# Altium PCB PCB1.PcbDoc
Units mm, origin at the board's own origin, x right, y up, seen from the top; angles counter-clockwise.
Board outline 100 x 100 mm, 4 copper layers (Top Layer, Internal Plane 1, Internal Plane 2, Bottom Layer); 98 components, 102 nets, 442 pads, 83 vias.
Unrouted connection lines stored in the file: 110.
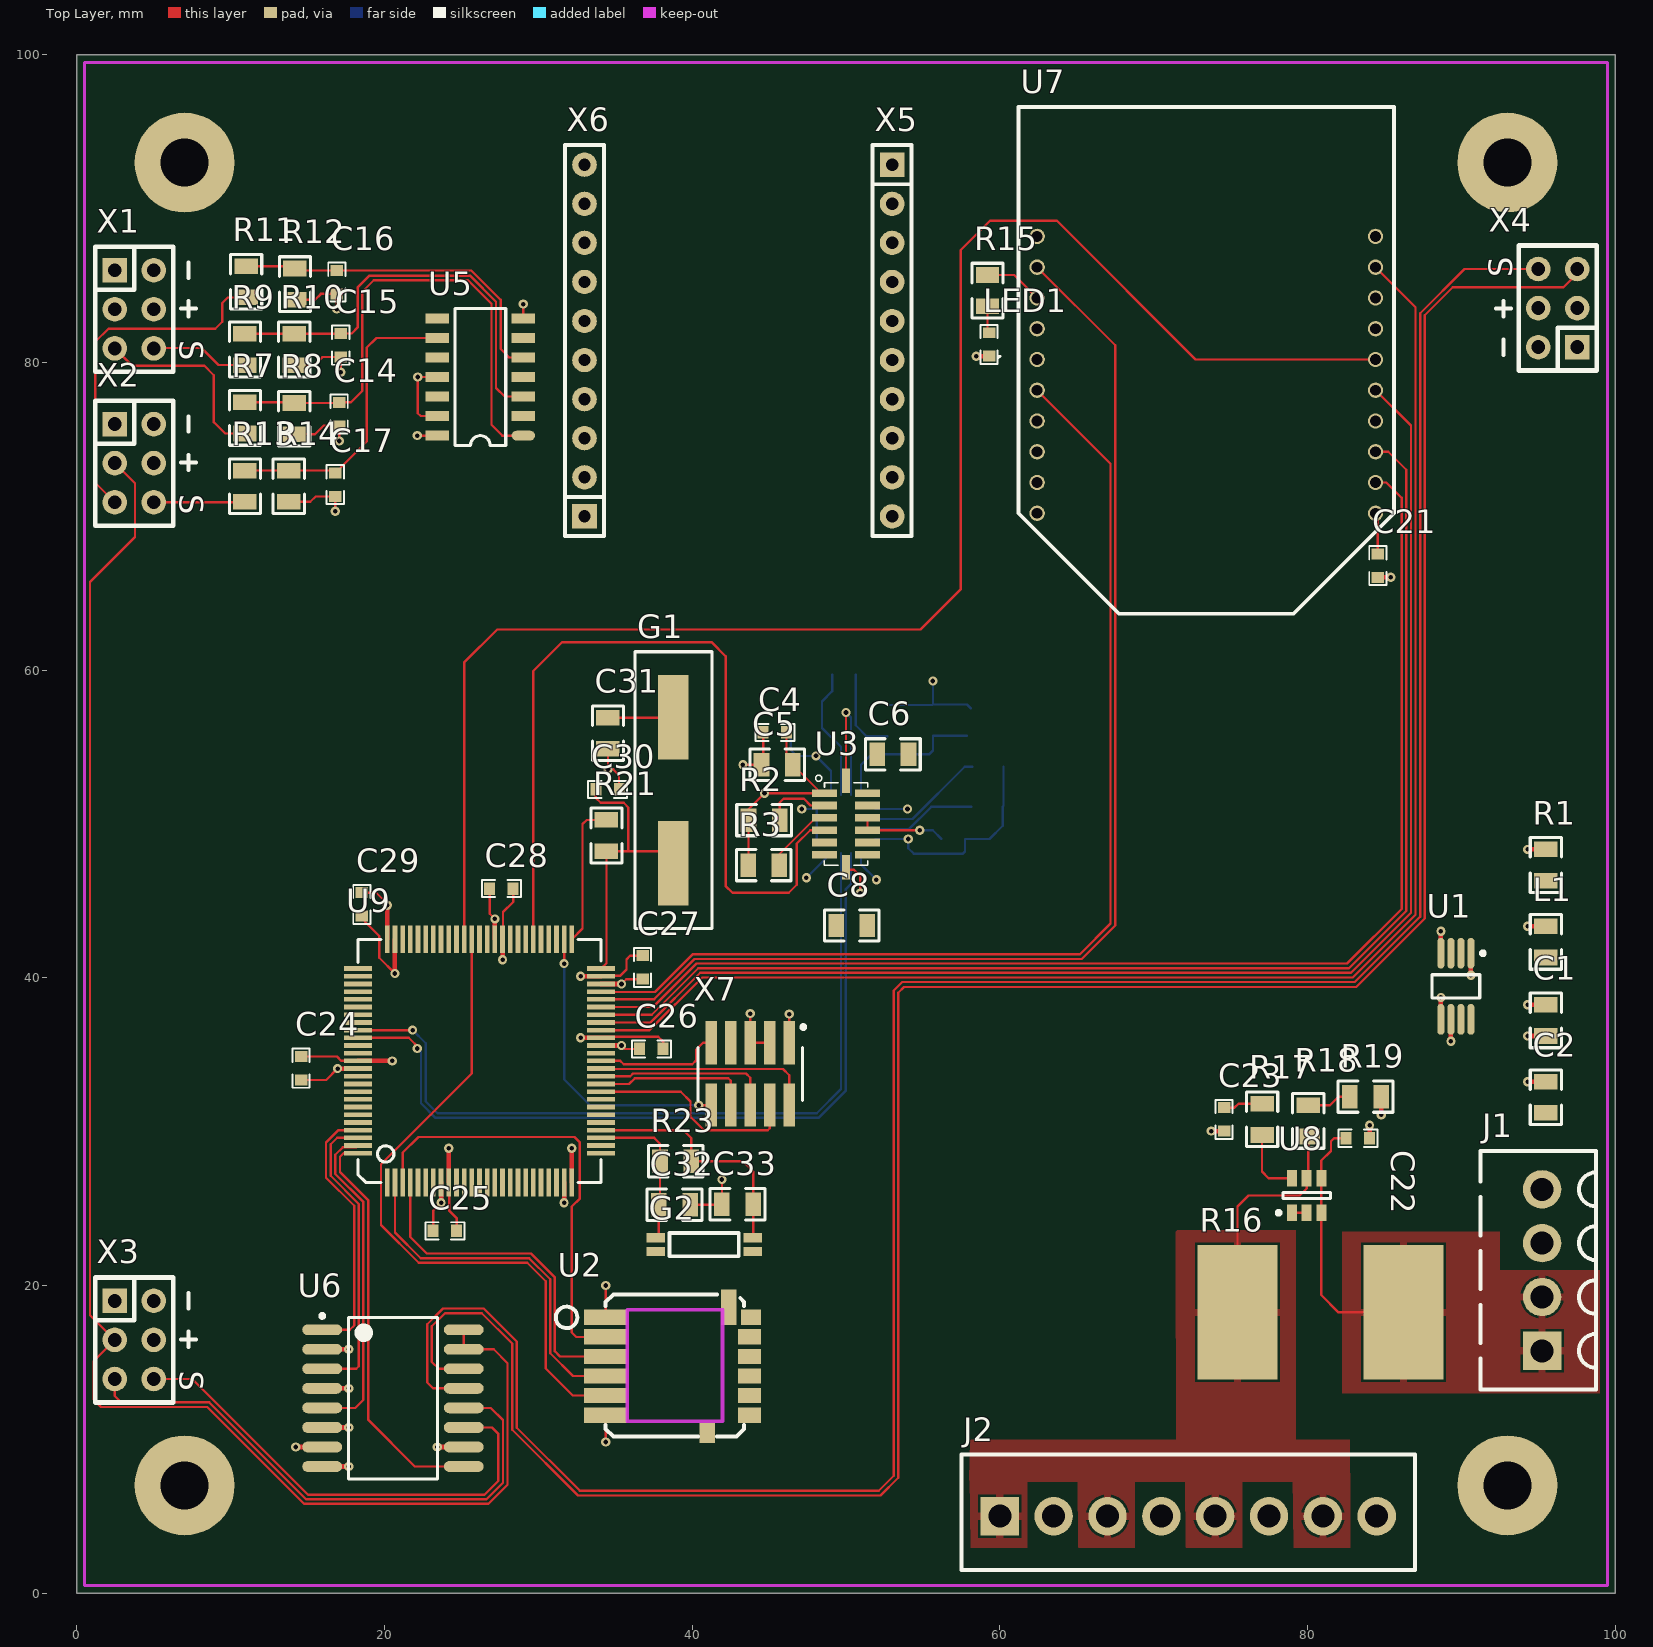
[diagram p0: Top Layer view]
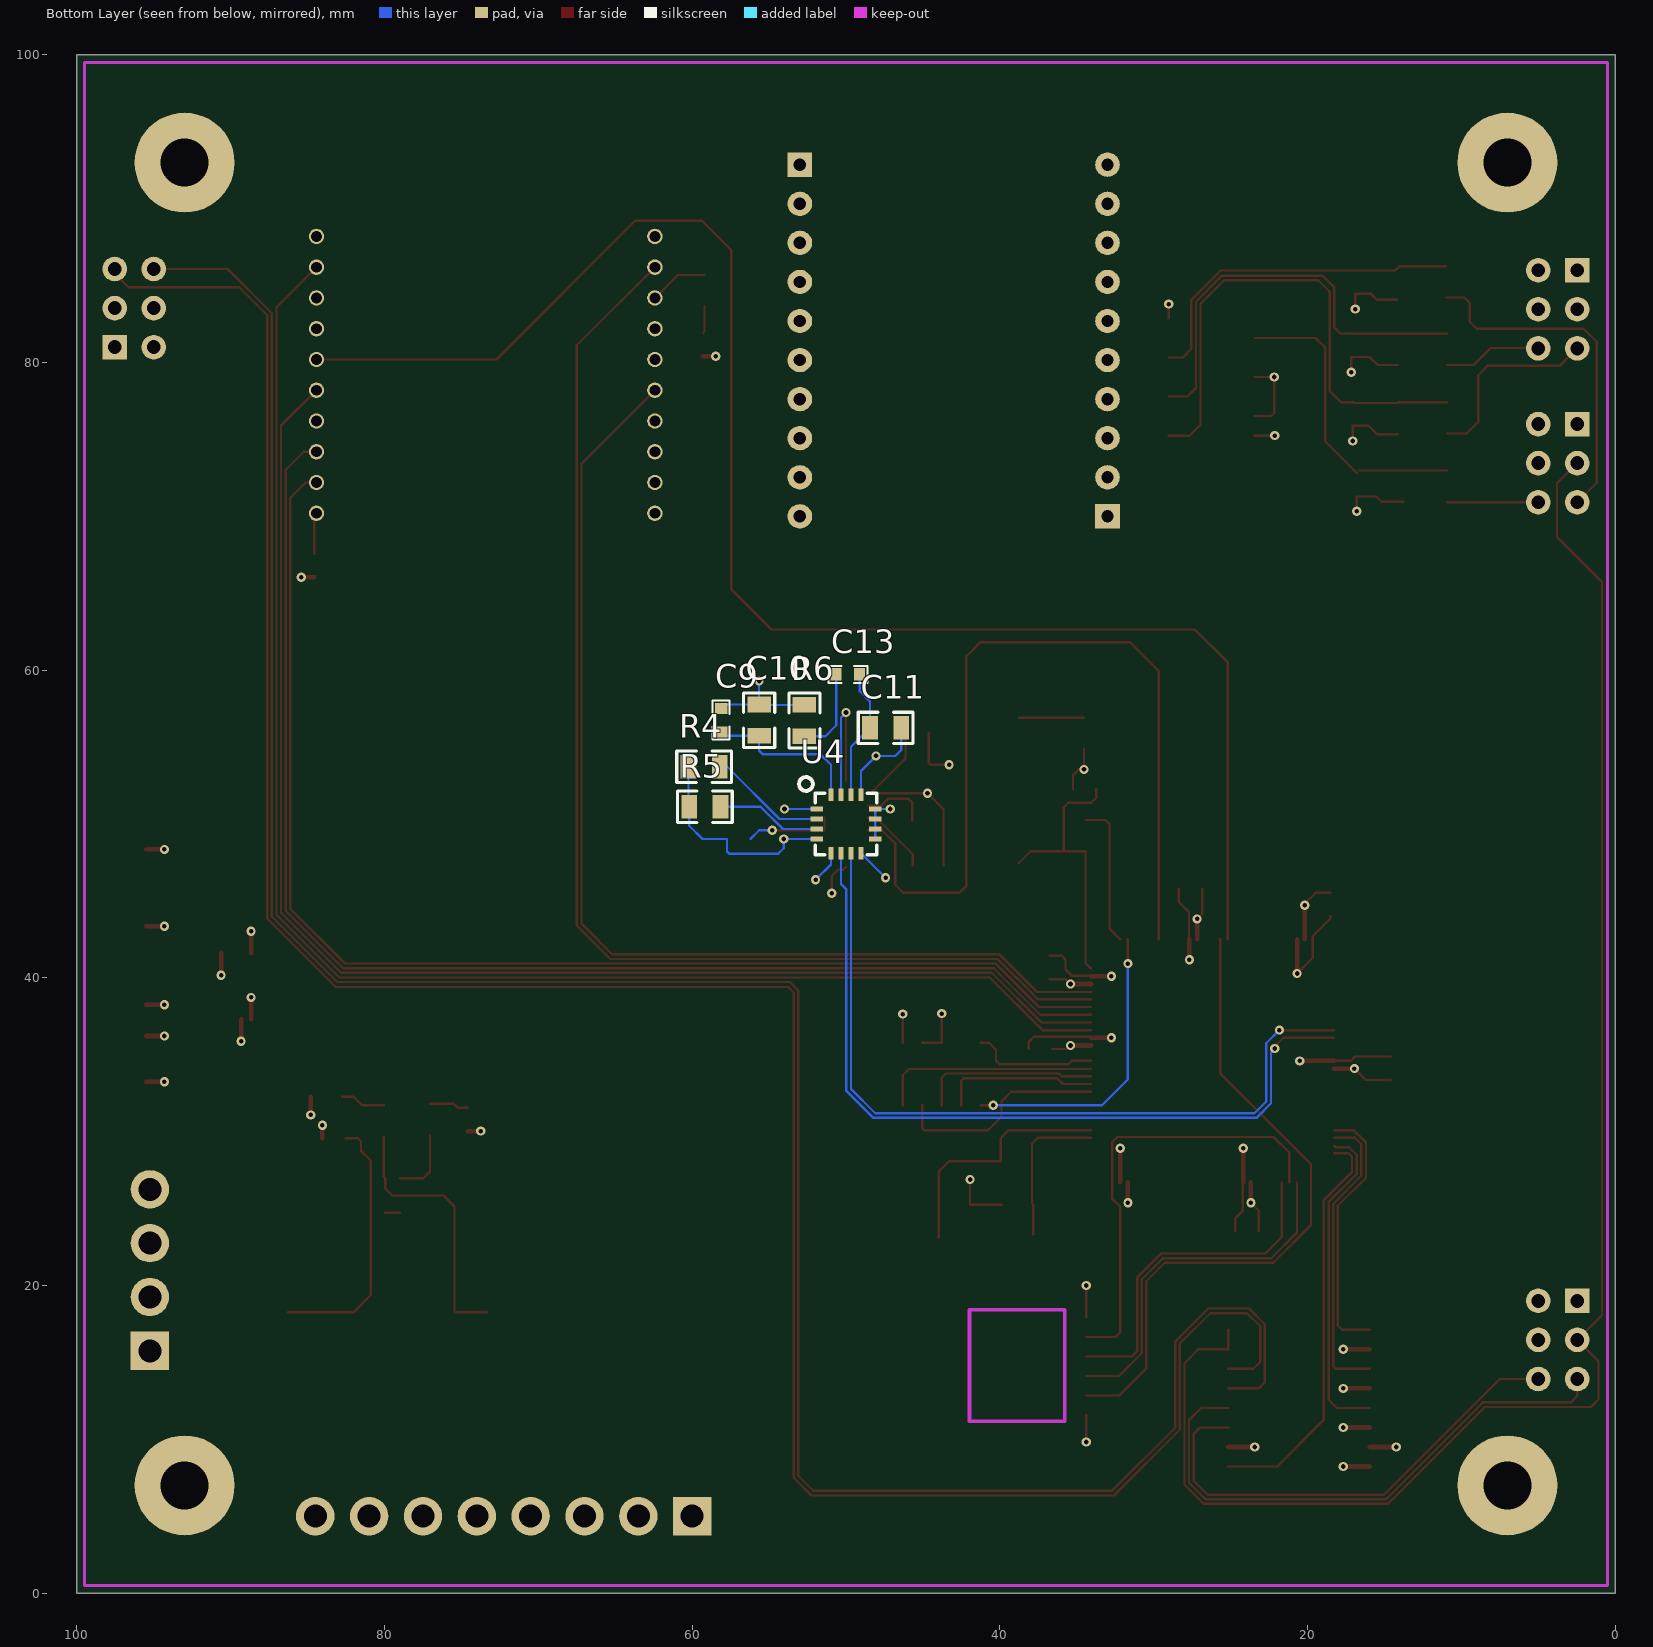
[diagram p1: Bottom Layer view, seen from below]
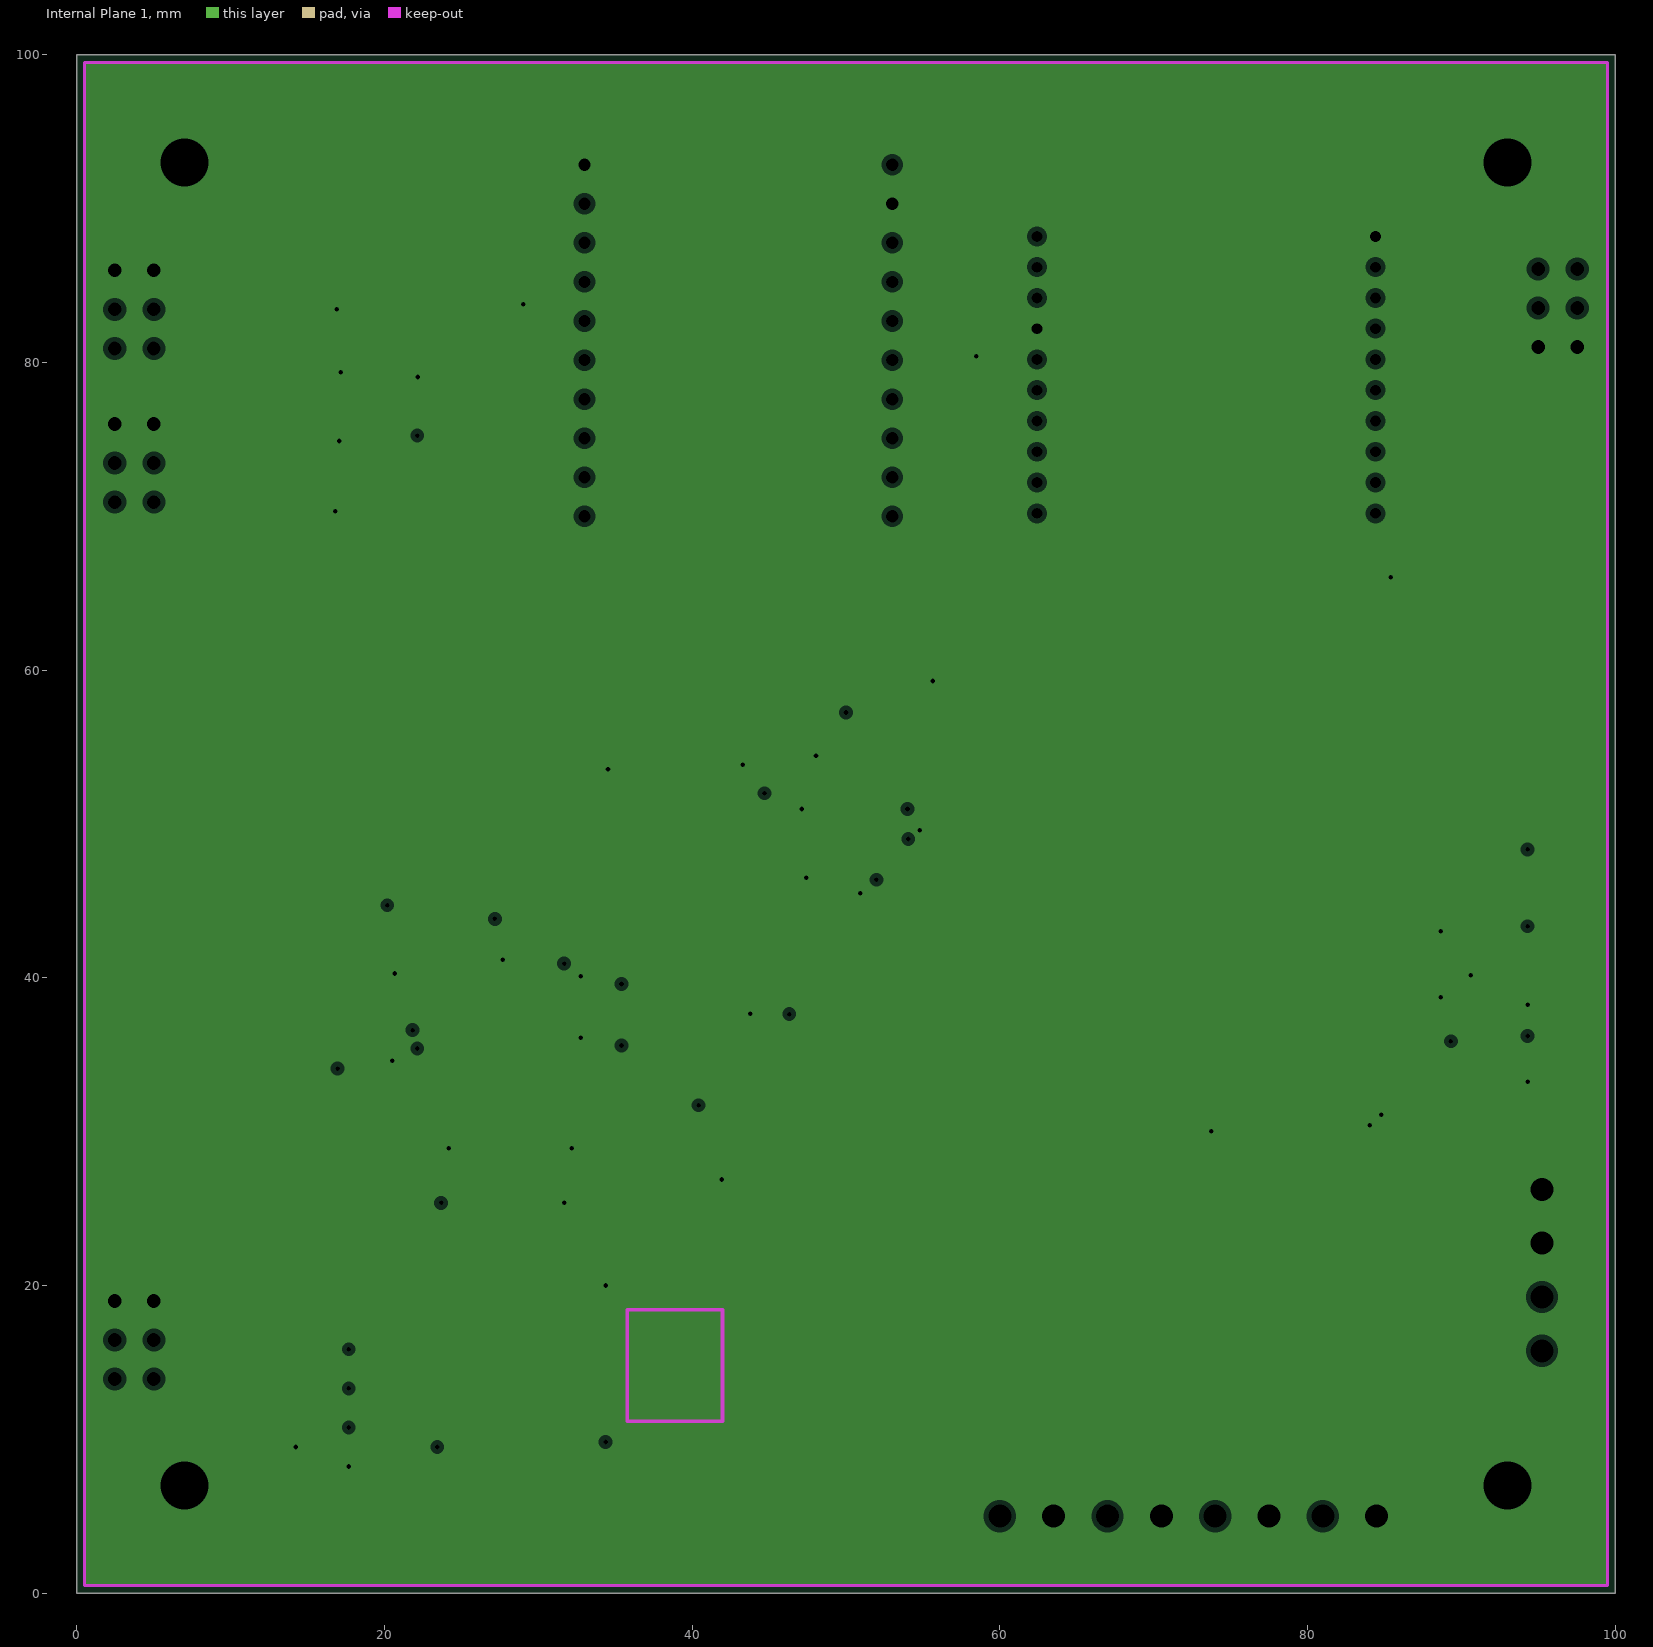
[diagram p2: Internal Plane 1, clearances drawn from the general rule]
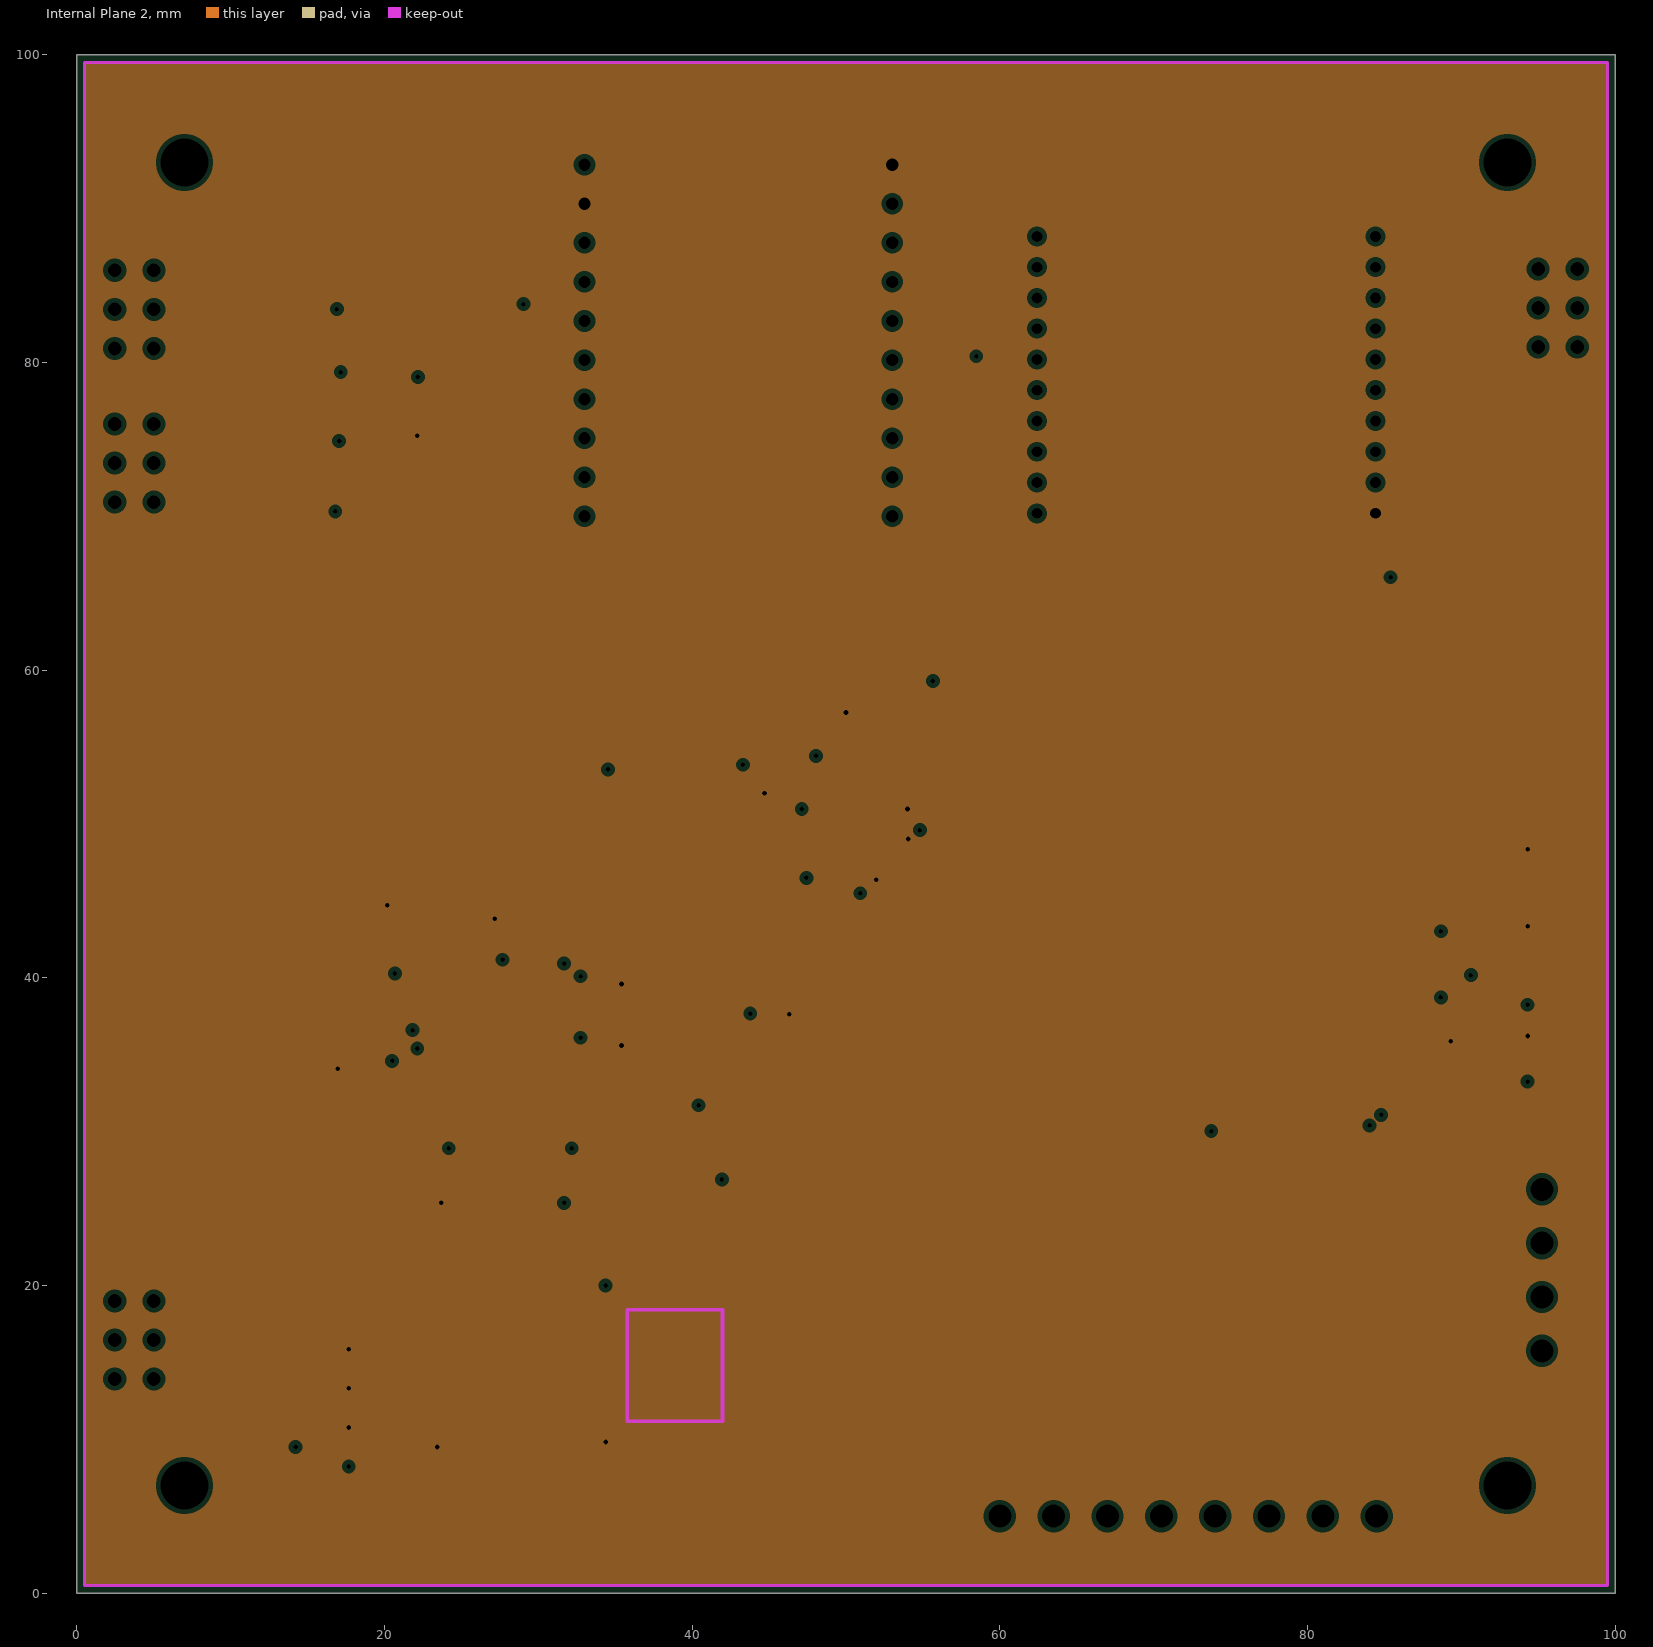
[diagram p3: Internal Plane 2, clearances drawn from the general rule]

## Layer stack, top to bottom
Top Layer: signal copper 0.0356
Dielectric: core 0.32, FR-4, Dk 4.8
Internal Plane 1: plane copper 0.0356, net GND
Dielectric: prepreg 0.32, FR-4, Dk 4.8
Internal Plane 2: plane copper 0.0356, net 3.3V
Dielectric: core 0.32, FR-4, Dk 4.8
Bottom Layer: signal copper 0.0356

## Board outline
0,0 100,0 100,100 0,100

## Design rules (kind name [scope] priority, off if disabled: settings)
Clearance [All] p1: gap=0.15
HoleSize [All] p1: absolutevalues=TRUE maxlimit=5 minlimit=0.3 maxpercent=80.000 minpercent=20.000
PlaneClearance [All] p1: clearance=0.3
PlaneConnect [All] p1: planeconnectstyle=Relief reliefexpansion=0.3 reliefentries=4 reliefconductorwidth=0.254 reliefairgap=0.2
PolygonConnect [All] p1: connectstyle=Relief reliefconductorwidth=0.5 reliefentries=4 polygonreliefangle="90 Angle"
RoutingVias [All] p1: holewidth=0.3 width=0.6 viastyle="Through Hole" minholewidth=0.3 minwidth=0.6 maxholewidth=0.3 maxwidth=0.6
SilkscreenOverComponentPads [All] p1: minsilkscreentomaskgap=0.254
SolderMaskExpansion [All] p1: expansion=0.102
Width [All] p1: maxlimit=5 minlimit=0.15 preferedwidth=0.3
24 further rules are at their usual default settings.

## Classes and differential pairs
component class Alimentation: C1 C2 L1 R1 U1
component class Capteurs: C3 C4 C5 C6 C8 C9 C10 C11 C13 R2 R3 R4 R5 R6 U2 U3 U4
component class ControlCommande&Motors: C14 C15 C16 C17 C18 C19 C20 R7 R8 R9 R10 R11 R12 R13 R14 U5 U6 X1 X2 X3 X4
component class InterfaceDataTelemetrie: C21 LED1 R15 U7
component class InterfaceExtension: X5 X6
component class MesureAlimentation: C22 C23 J1 J2 R16 R17 R18 R19 U8
component class Microcontroleur: BT1 C24 C25 C26 C27 C28 C29 C30 C31 C32 C33 C34 C35 C36 C37 D1 G1 G2 L2 L3 LED2 LED3 LED4 LED5 LED6 LED7 LED8 R20 R21 R22 R23 R24 R25 R26 R27 R28 R29 R30 U9 X7

## Components (designator, comment, footprint, x,y, rotation, side; value= is the part's Value field where it differs from the comment)
BT1 "3000TR" 3000TR -167.375,40.25 r90 top
C1 "C2012X5R1A226M/1.25" 080501 95.5,37.234 r90 top
C2 "GRM21BR61E106KA73L" 080501 95.5,32.234 r90 top
C3 "GRM188R71E104KA01D" 060301 196.784,18.1 r0 top
C4 "GRM188R71E104KA01D" 060301 45.375,55.95 r270 top
C5 "08056D106KAT2A" 080501 45.525,53.85 r0 top
C6 "UMK212F224ZD-T" 080501 53.05,54.525 r180 top
C8 "C0805C475K4PACTU" 080501 50.375,43.4 r0 top
C9 "GRM188R71E104KA01D" 060301 58.125,56.75 r0 bottom
C10 "08056D106KAT2A" 080501 55.65,56.75 r270 bottom
C11 "C0805C103K4RACTU" 080501 47.425,56.25 r0 bottom
C13 "C2012Y5V1H474Z/0.85" 060301 49.875,59.725 r270 bottom
C14 "GRM188R71E104KA01D" 060301 17.05,76.65 r180 top
C15 "GRM188R71E104KA01D" 060301 17.15,81.125 r180 top
C16 "GRM188R71E104KA01D" 060301 16.9,85.225 r180 top
C17 "GRM188R71E104KA01D" 060301 16.8,72.059 r180 top
C18 "GRM188R71E104KA01D" 060301 -125.575,23.8 r0 top
C19 "GRM188R71E104KA01D" 060301 135.499,36.099 r0 top
C20 "GRM188R71E104KA01D" 060301 141.099,36.099 r0 top
C21 "GRM188R71E104KA01D" 060301 84.575,66.8 r180 top
C22 "GRM188R71E104KA01D" 060301 83.275,29.575 r270 top
C23 "GRM188R71E104KA01D" 060301 74.575,30.8 r180 top
C24 "GRM188R71E104KA01D" 060301 14.575,34.125 r0 top
C25 "GRM188R71E104KA01D" 060301 23.925,23.55 r270 top
C26 "GRM188R71E104KA01D" 060301 37.35,35.375 r270 top
C27 "GRM188R71E104KA01D" 060301 36.775,40.675 r0 top
C28 "GRM188R71E104KA01D" 060301 27.6,45.8 r270 top
C29 "GRM188R71E104KA01D" 060301 18.525,44.775 r180 top
C30 "GQM2195C1H200JB01D" 060301 34.5,52.25 r270 top
C31 "GQM2195C1H200JB01D" 080501 34.525,55.9 r270 top
C32 "GRM21A5C2E120JW01D" 080501 38.85,25.25 r0 top
C33 "GRM21A5C2E120JW01D" 080501 42.95,25.275 r180 top
C34 "GRM188R71E104KA01D" 060301 -134.8,52.25 r0 top
C35 "GRM188R71E104KA01D" 060301 -142.775,52.825 r0 top
C36 "GRM188R71E104KA01D" 060301 -152.75,52.475 r0 top
C37 "GRM188R71E104KA01D" 060301 -162.725,52.4 r0 top
D1 "BAT54C" SOT2301 -155.975,55.225 r0 top
G1 "ECS-40-20-5PX-TR" Crystal 38.775,52.2 r90 top
G2 "ECS-.327-12.5-38" Crystal2 40.775,22.65 r180 top
J1 "CON4" SL354D 95.25,15.75 r90 top
J2 "CON8" SL358D 60,5 r0 top
L1 "VLF3012ST-2R2M1R4" 080503 95.5,42.334 r90 top
L2 "BLM21AG601SN1D" 080501 -130.575,56.375 r0 top
L3 "BLM21AG601SN1D" 080501 -146.775,55.775 r0 top
LED1 "LG L29K-G2J1-24-Z" 060301_led 59.3,81.175 r180 top
LED2 "LG L29K-G2J1-24-Z" 060301_led -34.45,50.425 r90 top
LED3 "LG L29K-G2J1-24-Z" 060301_led -53.675,57.6 r90 top
LED4 "LG L29K-G2J1-24-Z" 060301_led -66.375,57.925 r90 top
LED5 "LG L29K-G2J1-24-Z" 060301_led -80.2,56.675 r90 top
LED6 "LG L29K-G2J1-24-Z" 060301_led -93.8,56.875 r90 top
LED7 "LG L29K-G2J1-24-Z" 060301_led -107.45,56.1 r90 top
LED8 "LG L29K-G2J1-24-Z" 060301_led -126.7,56.75 r90 top
R1 "ERJ-6GEYJ104V" 080501 95.5,47.334 r90 top
R2 "ERJ-6GEYJ103V" 080501 44.675,50.25 r180 top
R3 "ERJ-6GEYJ103V" 080501 44.65,47.325 r180 top
R4 "ERJ-6GEYJ103V" 080501 59.225,53.725 r0 bottom
R5 "ERJ-6GEYJ103V" 080501 59.175,51.125 r0 bottom
R6 "ERJ-6GEYJ103V" 080501 52.7,56.725 r90 bottom
R7 "RMCF0805JT820R" 080501 10.925,76.4 r90 top
R8 "ERJ-6GEYJ162V" 080501 14.125,76.35 r270 top
R9 "RMCF0805JT820R" 080501 10.925,80.85 r90 top
R10 "ERJ-6GEYJ162V" 080501 14.125,80.85 r270 top
R11 "RMCF0805JT820R" 080501 11,85.25 r90 top
R12 "ERJ-6GEYJ162V" 080501 14.175,85.1 r270 top
R13 "RMCF0805JT820R" 080501 10.925,71.959 r90 top
R14 "ERJ-6GEYJ162V" 080501 13.775,71.959 r270 top
R15 "RMCF0805JT820R" 080501 59.2,84.675 r270 top
R16 "WSLP59313L000FEB" 5.2x8.75 86.25,18.25 r0 top
R17 "ERJ-6GEYJ103V" 080501 77.05,30.8 r90 top
R18 "ERJ-6GEYJ822V" 080501 80.05,30.7 r90 top
R19 "ERJ-6GEYJ162V" 080501 83.775,32.275 r0 top
R20 "RC0603FR-071KL" 060301 -142.475,42.625 r0 top
R21 "RMCF0805JT820R" 080501 34.425,49.25 r270 top
R22 "RMCF0805JT820R" 080501 -17.675,52.987 r0 top
R23 "ERJ-6GEYJ103V" 080501 38.925,28.075 r180 top
R24 "RMCF0805JT820R" 080501 -41.075,52.987 r0 top
R25 "RMCF0805JT820R" 080501 -60.075,52.987 r0 top
R26 "RMCF0805JT820R" 080501 -73.275,52.987 r0 top
R27 "RMCF0805JT820R" 080501 -86.575,52.987 r0 top
R28 "RMCF0805JT820R" 080501 -99.775,52.987 r0 top
R29 "RMCF0805JT820R" 080501 -118.775,52.987 r0 top
R30 "RC0603FR-071KL" 060301 -110.65,52.75 r0 top
U1 "TPS62160DGK" TSOP65P490-8AM 89.65,39.45 r270 top
U2 "MS5534-CM" MS5534B 34.375,17.925 r180 top
U3 "LSM303DLHCTR" LGA-14L 50,50 r90 top
U4 "L3G4200DTR" LGA-16 50,50 r180 bottom
U5 "SN74AHC14D" SO1401 29.025,75.25 r180 top
U6 "MIC4468ZWM" SOIC127P1030-16M 20.55,12.675 r0 top
U7 "XBP24BZ7WIT-004J" XBee-Pro 73.425,88.2 r180 top
U8 "MAX4173TEUT+T" SOT26A-6AM 79.95,25.85 r90 top
U9 "MK10DN512ZVLL10" QFP100-1 20.175,26.7 r0 top
X1 "CON6/CP" J2X3_2.54 5,86 r270 top
X2 "CON6/CP" J2X3_2.54 5,76 r270 top
X3 "CON6/CP" J2X3_2.54 5,19 r270 top
X4 "CON6/CP" J2X3_2.54 95,81 r90 top
X5 "CON10" SIP10 53,92.86 r270 top
X6 "CON10" SIP10 33,70 r90 top
X7 "CON10" FTSH-105-XX-X-DV-K 43.775,33.75 r0 top

## Footprints (in the part's own frame and the unit in brackets; to place one, negate y for a bottom-side part, rotate by r counter-clockwise, add the part's x,y. Pads: shape width x height; smd on the part's side, far side on the other; paste and mask are expansions set on the pad)
5.2x8.75 [mm] "PowerResistorFootPrint"
  rect 5.2x8.75 smd: 1(0,0) 2(-10.8,0)
3000TR [mm] "HOLDER BATTERY COIN 12MM DIA SMD"
  rect 3.2x3.2 smd: 1(-7.85,0) 3(7.85,0)
  rect 5x5 smd: 2(0,0)
  silkscreen extent -6.6,-6.7 6.8,6.5
060301 [mil]
  rect 32.01x27.99 smd: 1(0,-30) 2(0,30)
  silkscreen extent -22,-50 22,50
060301_led [mil] "LED"
  rect 32.01x27.99 smd: 1(0,-30) 2(0,30)
  silkscreen extent -30,-50 22,50
080501 [mil]
  rect 40x60 smd: 1(-40,0) 2(40,0)
  silkscreen extent -70,-40 70,40
080503 [mil]
  rect 40x60 smd: 1(-40,0) 2(40,0)
  silkscreen extent -70,-40 70,40
Crystal [mm]
  rect 5.5x2 smd: 1(-4.75,0) 2(4.75,0)
  silkscreen extent -9,-2.5 9,2.5
Crystal2 [mm]
  rect 1.2x0.6 smd: 1(-3.15,-0.45) 2(3.15,-0.45) 3(3.15,0.45) 4(-3.15,0.45)
  silkscreen extent -2.25,-0.75 2.25,0.75
FTSH-105-XX-X-DV-K [mm] "1.27mm pitch, 10 pin, terminal strip; keyed"
  rect 0.75x2.8 smd mask+0: 1(2.54,2.03) 2(2.54,-2.03) 3(1.27,2.03) 4(1.27,-2.03) 5(0,2.03) 6(0,-2.03) 7(-1.27,2.03) 8(-1.27,-2.03) 9(-2.54,2.03) 10(-2.54,-2.03)
  silkscreen extent -3.39,-1.71 3.57,3.17
J2X3_2.54 [mm]
  rect 1.6x1.6 hole 0.9: 1(0,-2.54)
  round 1.6 hole 0.9: 2(0,0) 3(2.54,-2.54) 4(2.54,0) 5(5.08,-2.54) 6(5.08,0)
  silkscreen extent -1.52,-3.81 6.6,2.75
LGA-14L [mm]
  rect 0.5x1.6 smd: 1(2,1.4) 2(1.2,1.4) 3(0.4,1.4) 4(-0.4,1.4) 5(-1.2,1.4) 6(-2,1.4) 8(-2,-1.4) 9(-1.2,-1.4) 10(-0.4,-1.4) 11(0.4,-1.4) 12(1.2,-1.4) 13(2,-1.4)
  rect 1.6x0.5 smd: 7(-2.8,0) 14(2.8,0)
  silkscreen extent -2.67,-1.4 3.17,1.98
LGA-16 [mm]
  rect 0.8x0.3 smd: 1(-1.9,0.975) 2(-1.9,0.325) 3(-1.9,-0.325) 4(-1.9,-0.975) 9(1.9,-0.975) 10(1.9,-0.325) 11(1.9,0.325) 12(1.9,0.975)
  rect 0.3x0.8 smd: 5(-0.975,-1.9) 6(-0.325,-1.9) 7(0.325,-1.9) 8(0.975,-1.9) 13(0.975,1.9) 14(0.325,1.9) 15(-0.325,1.9) 16(-0.975,1.9)
  silkscreen extent -3.05,-2 2,3.05
MS5534B [mm] "Barometer Module"
  rect 2.8x1 smd: 1(0,0) 2(0,1.27) 3(0,2.54) 4(0,3.81) 5(0,5.08) 6(0,6.35)
  rect 1x1.3 smd: 7(-6.6,7.525)
  rect 1x2.3 smd: 8(-8,-0.65)
  rect 1.5x1 smd: 9(-9.35,6.35) 10(-9.35,5.08) 11(-9.35,3.81) 12(-9.35,2.54) 13(-9.35,1.27)
  rect 1.3x1 smd: 14(-9.45,0)
  Keep-Out Layer lines w0.25: -1.4,6.75 -7.6,6.75 -7.6,-0.5 -1.4,-0.5 -1.4,6.75
  silkscreen extent -9,-1.5 3.24,7.75
QFP100-1 [mil]
  rect 12.01x70.98 smd: 1(0,0) 2(19.69,0)
  rect 12x71 smd: 3(39.37,0) 4(59.06,0) 5(78.74,0) 6(98.43,0) 7(118.11,0) 8(137.8,0) 9(157.48,0) 10(177.17,0) 11(196.85,0) 12(216.54,0) 13(236.22,0) 14(255.91,0) 15(275.59,0) 16(295.28,0) 17(314.96,0) 18(334.65,0) 19(354.33,0) 20(374.02,0) 21(393.7,0) 22(413.39,0) 23(433.07,0) 24(452.76,0) 25(472.44,0) 51(472.44,622.05) 52(452.76,622.05) 53(433.07,622.05) 54(413.39,622.05) 55(393.7,622.05) 56(374.02,622.05) 57(354.33,622.05) 58(334.65,622.05) 59(314.96,622.05) 60(295.28,622.05) 61(275.59,622.05) 62(255.91,622.05) 63(236.22,622.05) 64(216.54,622.05) 65(196.85,622.05) 66(177.17,622.05) 67(157.48,622.05) 68(137.8,622.05) 69(118.11,622.05) 70(98.43,622.05) 71(78.74,622.05) 72(59.06,622.05) 73(39.37,622.05) 74(19.69,622.05) 75(0,622.05)
  rect 71x12 smd: 26(547.24,74.8) 27(547.24,94.49) 28(547.24,114.17) 29(547.24,133.86) 30(547.24,153.54) 31(547.24,173.23) 32(547.24,192.91) 33(547.24,212.6) 34(547.24,232.28) 35(547.24,251.97) 36(547.24,271.65) 37(547.24,291.34) 38(547.24,311.02) 39(547.24,330.71) 40(547.24,350.39) 41(547.24,370.08) 42(547.24,389.76) 43(547.24,409.45) 44(547.24,429.13) 45(547.24,448.82) 46(547.24,468.5) 47(547.24,488.19) 48(547.24,507.87) 49(547.24,527.56) 50(547.24,547.24) 77(-74.8,527.56) 78(-74.8,507.87) 79(-74.8,488.19) 80(-74.8,468.5) 81(-74.8,448.82) 82(-74.8,429.13) 83(-74.8,409.45) 84(-74.8,389.76) 85(-74.8,370.08) 86(-74.8,350.39) 87(-74.8,330.71) 88(-74.8,311.02) 89(-74.8,291.34) 90(-74.8,271.65) 91(-74.8,251.97) 92(-74.8,232.28) 93(-74.8,212.6) 94(-74.8,192.91) 95(-74.8,173.23) 96(-74.8,153.54) 97(-74.8,133.86) 98(-74.8,114.17) 99(-74.8,94.49) 100(-74.8,74.8)
  rect 70.98x12.01 smd: 76(-74.8,547.24)
  silkscreen extent -75,0 547,622
SIP10 [mil]
  rect 62x63 hole 31.5: 1(0,0)
  oval 62x63 hole 31.5: 2(100,0) 3(200,0) 4(300,0) 5(400,0) 6(500,0) 7(600,0) 8(700,0) 9(800,0) 10(900,0)
  silkscreen extent -50,-50 950,50
SL354D [mm]
  rect 2.5x2.5 hole 1.5: 1(0,0)
  round 2.5 hole 1.5: 2(3.5,0) 3(7,0) 4(10.5,0)
  silkscreen extent -2.5,-3.5 13,4
SL358D [mm]
  rect 2.5x2.5 hole 1.5: 1(0,0)
  round 2.5 hole 1.5: 2(3.5,0) 3(7,0) 4(10.5,0) 5(14,0) 6(17.5,0) 7(21,0) 8(24.5,0)
  silkscreen extent -2.5,-3.5 27,4
SO1401 [mil]
  oval 60x25 smd: 1(0,0)
  rect 60x25 smd: 2(0,-50) 3(0,-100) 4(0,-150) 5(0,-200) 6(0,-250) 7(0,-300) 8(220,-300) 9(220,-250) 10(220,-200) 11(220,-150) 12(220,-100) 13(220,-50) 14(220,0)
  silkscreen extent 45,-325 175,25
SOIC127P1030-16M [mm] "SOIC, 16-Leads, Body 10.3x7.5mm, Pitch 1.27mm, IPC Low Density"
  oval 2.6x0.7 smd: 1(-4.6,4.445) 2(-4.6,3.175) 3(-4.6,1.905) 4(-4.6,0.635) 5(-4.6,-0.635) 6(-4.6,-1.905) 7(-4.6,-3.175) 8(-4.6,-4.445) 9(4.6,-4.445) 10(4.6,-3.175) 11(4.6,-1.905) 12(4.6,-0.635) 13(4.6,0.635) 14(4.6,1.905) 15(4.6,3.175) 16(4.6,4.445)
  silkscreen extent -4.72,-5.25 2.9,5.47, body extent -3.75,-5.25 3.75,5.25, height 2.65
SOT26A-6AM [mm]
  rect 1.05x0.65 smd: 1(-1.125,0.95) 2(-1.125,0) 3(-1.125,-0.95) 4(1.125,-0.95) 5(1.125,0) 6(1.125,0.95)
  silkscreen extent -1.25,-1.55 0.2,1.95, body extent -0.9,-1.55 0.9,1.55
SOT2301 [mil]
  rect 40x40 smd: 1(80,0) 2(0,0) 3(40,-80)
  silkscreen extent -20,-60 100,-20
TSOP65P490-8AM [mm] "TSOP, 8-Leads, Body 3x3mm, Pitch 0.65mm, IPC Low Density"
  oval 2x0.45 smd: 1(-2.15,0.975) 2(-2.15,0.325) 3(-2.15,-0.325) 4(-2.15,-0.975) 5(2.15,-0.975) 6(2.15,-0.325) 7(2.15,0.325) 8(2.15,0.975)
  silkscreen extent -2.27,-1.55 0.75,1.88, body extent -1.6,-1.6 1.6,1.6, height 1.1
XBee-Pro [mm]
  round 1 hole 0.7: 1(-11,18) 2(-11,16) 3(-11,14) 4(-11,12) 5(-11,10) 6(-11,8) 7(-11,6) 8(-11,4) 9(-11,2) 10(-11,0) 11(11,0) 12(11,2) 13(11,4) 14(11,6) 15(11,8) 16(11,10) 17(11,12) 18(11,14) 19(11,16) 20(11,18)
  silkscreen extent -12.2,-8.41 12.2,24.53

## Part data
BT1: library part BAT_1, "HOLDER BATTERY COIN 12MM DIA SMD"
C1 C2 C3 C4 C5 C6 C8 C9 C10 C11 C13 C14 C15 C16 C17 C18 C19 C20 C21 C22 C23 C24 C25 C26 C27 C28 C29 C30 C31 C32 C33 C34 C35 C36 C37: library part CAPA, "CAPA"
D1: "DIODE SCHTTKY CC 200MA 30V SOT23"
G1 G2: library part CRYSTAL
L1: library part INDUCTOR
L2 L3: library part "Ferrite Bead", "FERRITE CHIP 600 OHM 200MA 0805"
LED1 LED2 LED3 LED4 LED5 LED6 LED7 LED8: library part LED
R1 R2 R3 R4 R5 R6 R7 R8 R9 R10 R11 R12 R13 R14 R15 R16 R17 R18 R19 R21 R22 R23 R24 R25 R26 R27 R28 R29: library part RES
R20 R30: library part RES, "RES 1.00K OHM 1/10W 1% 0603 SMD"
U1: library part TPS62160, "IC BUCK SYNC ADJ 1A 8MSOP"
U2: library part MS5534B, "Barometer Module"
U3: library part LSM303DLHC, "Accéléromètre et magnétomètre"
U4: library part L3G4200D, "Gyroscope"
U6: library part MIC4468
U7: library part "MaxStream XBee-PRO"
U8: library part Max4173, "Amplificateur capteur de courant"
X1: "Connecteur récepteur télécommande cannaux 1 & 2"
X2: "Connecteur récepteur télécommande cannaux 3 & 4"
X3: "Connecteur contrôleur moteurs 3 (arrière) & 4 (gauche)"
X4: "Connecteur contrôleur moteurs 1 (avant) & 2 (droite)"

## Free pads (board coordinates)
  round 6.5 hole 3.1: ""(7,7) ""(7,93) ""(93,7) ""(93,93)

## Via types
v1: diameter 0.6, hole 0.3, Top Layer to Bottom Layer, 83 vias

## Nets (pads, with @x,y where several pads share a name; then routed paths per layer and width w, separated by ;. In a path a pad name is that pad's centre, name@x,y a point inside that pad or via, vN(x,y) a via of type N, cw(c..) or ccw(c..) an arc to the next point about the centre after c; other vN are vias at no path point)
3.3V: C1.1 C3.1 C4.2 C5.2 C18.1 C21.1 C24.1 C25.1 C26.1 C27.1 C28.1 C29.1 D1.2 L1.2 L2.1 L3.1 R1.2 R2.2 R3.2 R4.2 R5.2 R20.1 R30.1 U1.6 U2.6 U3.1 U3.14 U4.1 U4.4 U4.5 U4.15 U5.14 U6.2 U6.4 U6.6 U6.10 U7.1 U9.8 U9.40 U9.48 U9.61 U9.75 U9.89 X5.1 X6.9 X7.1 | length 90.2
  Top Layer w0.15: C24.1 16.209,33.363 v1(16.946,34.1) ; C29.1 19.463,45.537 20.175,44.825 v1(20.175,44.72) ; v1(22.125,75.25) U5.14 ; C25.1 23.163,24.859 v1(23.675,25.372) ; C28.1 26.838,44.166 v1(27.175,43.829) ; v1(34.375,9.825) U2.6 ; v1(35.404,35.6) 35.629,35.375 C26.1 ; v1(35.404,39.6) 35.717,39.913 C27.1 ; R3.2 43.659,47.35 R2.2 43.659,50.959 v1(44.7,52) U3.1@48.391,52 ; C4.2 46.137,54.254 C5.2 U3.1@48.391,52 ; X7.1 v1(46.315,37.64) ; U3.1 U3.1@48.391,52 ; U3.14 v1(50,57.25) ; v1(51.975,46.375) v1@52,46.375 ; v1(54.05,49.025) v1@54.1,48.975 ; U7.1 84.575,70.05 C21.1
  Top Layer w0.3: v1(-143.308,41.863) R20.1 ; U6.6 v1(17.677,10.77) ; U6.4 v1(17.677,13.31) ; U6.2 v1(17.677,15.85) ; v1(16.946,34.1) U9.89 ; U9.75 v1(20.175,44.72) ; v1(23.423,9.5) U6.10 ; v1(23.675,25.372) U9.8 ; U9.61 v1(27.175,43.829) ; U9.40 v1(35.404,35.6) ; U9.48 v1(35.404,39.6) ; v1(89.325,35.873) U1.6 ; v1(94.311,36.218) 94.568,36.218 C1.1 ; v1(94.311,43.35) 94.568,43.35 L1.2 ; v1(94.311,48.35) 94.568,48.35 R1.2 ; v1(115.651,17.338) 116.484,17.338 ; v1(160.15,17.338) 160.984,17.338 ; v1(179.7,17.111) 179.7,18.3 ; v1(184.7,17.111) 184.7,18.3 ; v1(189.7,17.111) 189.7,18.3 ; v1(191.65,18.862) 192.484,18.862 ; v1(195.95,17.338) C3.1
  Bottom Layer w0.15: v1@34.325,9.775 v1(34.375,9.825) ; v1@50.075,57.325 v1(50,57.25) 50.325,56.925 U4.15 ; U4.5 50.975,47.375 v1(51.975,46.375) ; U4.4 v1(54.05,49.025) 54.05,48.425 54.4,48.075 57.6,48.075 57.737,48.212 57.737,49.025 59.325,49.025 60.191,49.891 R5.2 ; U4.1 v1(54,50.975) ; R5.2@60.241,51.175 R4.2
5V: C19.1 C20.1 U6.15 U6.16 X1.3 X1.4 X2.3 X2.4 X3.3 X3.4 X4.3 X4.4 | length 106.5
  Top Layer w0.15: X2.3 3.775,72.145 3.775,68.65 0.85,65.725 0.85,18.07 X3.3 1.075,15.075 1.075,12.6 1.575,12.1 8.476,12.1 14.776,5.8 26.749,5.8 28,7.051 28,14.95 27.1,15.85 U6.15 U6.16
CONNECTEURX1_CANAL1: R7.1 X1.5 | length 12.5
  Top Layer w0.15: X1.5 3.58,79.8 8.275,79.8 8.9,79.175 8.9,76.125 9.641,75.384 R7.1
CONNECTEURX1_CANAL2: R9.1 X1.6 | length 6.4
  Top Layer w0.15: X1.6@5.03,80.95 8.093,80.95 9.209,79.834 R9.1
CONNECTEURX2_CANAL3: R11.1 X2.5 | length 22.7
  Top Layer w0.15: X2.5 1.2,72.18 1.2,81.35 2.05,82.2 9,82.2 9.45,82.65 9.45,83.875 9.809,84.234 R11.1
CONNECTEURX2_CANAL4: R13.1 X2.6 | length 5.9
  Top Layer w0.15: X2.6 R13.1@10.902,70.92
CONNECTEURX3_DRIVERMOTEUR3: U6.12 X3.5 | length 36.5
  Top Layer w0.15: X3.5 2.46,12.816 2.875,12.4 8.6,12.4 14.901,6.1 26.624,6.1 27.7,7.176 27.7,11.25 26.91,12.04 U6.12
CONNECTEURX3_DRIVERMOTEUR4: U6.11 X3.6 | length 31.4
  Top Layer w0.15: X3.6 7.505,13.92 15.025,6.4 26.5,6.4 27.4,7.3 27.4,10.35 26.98,10.77 U6.11
CONNECTEURX4_DRIVERMOTEUR1: U6.14 X4.5 | length 162.2
  Top Layer w0.15: U6.14 23.52,14.58 23.075,15.025 23.075,17.35 23.925,18.2 26.325,18.2 28.3,16.225 28.3,10.625 32.575,6.35 52.25,6.35 53.4,7.5 53.4,39.025 53.775,39.4 83.171,39.4 87.625,43.854 87.625,83.076 89.449,84.9 96.65,84.9 97.54,85.79 X4.5
CONNECTEURX4_DRIVERMOTEUR2: U6.13 X4.6 | length 161.5
  Top Layer w0.15: U6.13 23.165,13.31 22.775,13.7 22.775,17.474 23.801,18.5 26.449,18.5 28.6,16.349 28.6,10.749 32.699,6.65 52.126,6.65 53.1,7.624 53.1,39.175 53.65,39.725 83.072,39.725 87.325,43.978 87.325,83.2 90.205,86.08 X4.6
GND: BT1.2 C1.2 C2.2 C3.2 C4.1 C5.1 C8.2 C9.1 C10.1 C11.1 C14.2 C15.2 C16.2 C17.2 C18.2 C19.2 C20.2 C21.2 C22.2 C23.2 C24.2 C25.2 C26.2 C27.2 C28.2 C29.2 C30.2 C31.2 C32.2 C33.2 C34.2 C35.1 C36.1 C37.1 J1.3 J1.4 J2.2 J2.4 J2.6 J2.8 LED1.2 LED2.2 LED3.2 LED4.2 LED5.2 LED6.2 LED7.2 LED8.2 pad. R6.2 R8.2 R10.2 R12.2 R14.2 R19.2 U1.1 U1.4 U1.5 U2.1 U3.7 U3.10 U3.11 U4.8 U4.9 U4.10 U4.11 U4.12 U4.13 U5.7 U5.11 U5.13 U6.7 U6.8 U7.10 U7.14 U8.1 U8.2 U9.9 U9.24 U9.25 U9.41 U9.49 U9.60 U9.74 U9.88 X1.1 X1.2 X2.1 X2.2 X3.1 X3.2 X4.1 X4.2 X5.2 X6.10 X7.3 X7.5 | length 129.3
  Top Layer w0.15: R14.2 15.168,70.943 15.522,71.297 C17.2 v1(16.8,70.325) ; R8.2 15.484,75.334 16.038,75.888 C14.2 v1(17.05,74.9) ; R10.2 15.434,79.834 15.963,80.363 C15.2 v1(17.15,79.375) ; R12.2 15.484,84.084 15.863,84.463 C16.2 v1(16.9,83.475) ; C24.2 16.902,34.887 17.189,34.6 U9.88 ; C29.2 18.525,43.85 19.65,42.725 19.65,41.305 v1(20.675,40.28) ; U5.13 22.355,76.52 22.165,76.71 v1(22.165,79.06) U5.11 ; U9.9 24.2,26.675 24.2,24.875 24.687,24.388 C25.2 ; U9.60 27.7,42.525 27.7,44.275 28.362,44.937 C28.2 ; U5.7 v1(29.025,83.8) ; U9.41 34.15,36.175 37.8,36.175 38.112,35.863 C26.2 ; U9.49 34.1,40.125 35.3,40.125 35.725,40.55 35.725,41.2 35.962,41.437 C27.2 ; U2.1 v1(34.375,20) ; v1(34.525,53.55) C31.2 ; 34.875,53.55 35.237,53.188 C30.2@35.237,52.25 ; C32.2 C33.2@41.909,25.25 ; C33.2 v1(41.934,26.891) ; v1(43.3,53.85) C5.1 44.613,53.954 C4.1 ; v1(43.775,37.675) X7.5 X7.3 ; v1(48.05,54.425) v1@48.05,54.575 ; U3.7 50.175,47.025 50.525,47.025 50.925,46.625 v1(50.925,45.5) ; U3.11 U3.10 v1(54.8,49.6) ; v1@55.625,59.325 v1(55.65,59.3) ; U8.1 U8.2
  Top Layer w0.3: v1(14.223,9.5) U6.7 ; U6.8 v1(17.677,8.23) ; U9.88 v1(20.495,34.6) ; v1(20.675,40.28) U9.74 ; U9.9 v1(24.175,28.92) ; v1(27.675,41.171) U9.60 ; v1(31.675,25.372) U9.24 ; U9.25 v1(32.175,28.92) ; v1(32.746,36.1) U9.41 ; v1(32.746,40.1) U9.49 ; v1(58.466,80.413) 58.724,80.413 LED1.2 ; v1(73.741,30.038) C23.2 ; C22.2 v1(84.037,30.409) ; C21.2 85.151,66.038 v1(85.409,66.038) ; v1(84.791,31.086) R19.2 ; U1.5 v1(88.675,38.727) ; U1.4 v1(88.675,43.027) ; v1(90.625,40.173) U1.1 ; v1(94.311,33.25) 94.568,33.25 C2.2 ; v1(94.311,38.25) 94.568,38.25 C1.2 ; v1(108.1,17.111) 108.1,18.3 ; v1(115.651,18.862) 116.484,18.862 ; v1(122.268,17.111) 122.268,18.3 ; v1(134.168,17.111) 134.168,18.3 ; v1(134.665,36.861) C19.2 ; v1(140.265,36.861) C20.2 ; 151.484,17.238 v1(152.318,17.238) ; v1(158.2,17.111) 158.2,18.3 ; v1(160.15,18.862) 160.984,18.862 ; v1(177.668,17.111) 177.668,18.3 ; v1(191.65,17.338) 192.484,17.338 ; v1(195.95,18.862) C3.2
  Bottom Layer w0.15: C11.1 46.409,54.816 46.8,54.425 v1(48.05,54.425) 49.025,53.45 U4.13 ; v1(47.125,50.975) U4.12 U4.11 U4.10 U4.9 ; v1(47.425,46.5) U4.8 ; R6.2 C10.1@55.625,57.741 ; v1(54.8,49.6) 55.638,49.6 56.213,49.025 ; v1(55.65,59.3) C10.1 57.871,57.766 C9.1
NetBT1_1: BT1.1 BT1.3 D1.1
NetC6_1: C6.1 U3.12
NetC6_2: C6.2 U3.13
NetC8_1: C8.1 U3.6
NetC9_2: C9.2 C10.2 U4.16 | length 10.2
  Bottom Layer w0.15: U4.16 50.975,53.85 51.65,54.525 55.4,54.525 55.65,54.775 C10.2 C9.2@57.871,55.734
NetC11_2: C11.2 C13.2 U4.14 | length 8.6
  Bottom Layer w0.15: C13.2 49.113,58.638 48.441,57.966 C11.2 49.675,55.016 U4.14
NetC13_1: C13.1 R6.1 | length 5.7
  Bottom Layer w0.15: C13.1 50.637,56.413 51.341,55.709 R6.1
NetC14_1: C14.1 R7.2 R8.1 U5.1 | length 33.9
  Top Layer w0.15: R7.2 R8.1@14.075,77.416 ; R8.1 C14.1@17.004,77.366 ; C14.1 17.812,77.412 18.55,78.15 18.55,84.6 19.3,85.35 25.426,85.35 26.95,83.826 26.95,75.95 27.65,75.25 U5.1
NetC15_1: C15.1 R9.2 R10.1 U5.3 | length 27.7
  Top Layer w0.15: R9.2 C15.1@17.129,81.866 ; C15.1 17.862,81.887 18.25,82.275 18.25,84.875 18.444,85.069 18.831,85.456 19.025,85.65 25.55,85.65 27.25,83.95 27.25,78.35 27.81,77.79 U5.3
NetC16_1: C16.1 R11.2 R12.1 U5.5 | length 22.4
  Top Layer w0.15: R11.2 14.025,86.266 R12.1 14.304,85.987 C16.1 25.637,85.987 27.55,84.074 27.55,80.875 28.095,80.33 U5.5
NetC17_1: C17.1 R13.2 R14.1 U5.9 | length 19.6
  Top Layer w0.15: R13.2 R14.1 C17.1@16.646,72.975 ; C17.1 18.85,74.871 18.85,80.975 19.475,81.6 U5.9
NetC22_1: C22.1 J1.1 J1.2 R16.1 U8.3 U8.4 | length 17.1
  Top Layer w0.15: C22.1 81.725,29.575 81.525,29.375 81.525,28.75 80.9,28.125 U8.4 U8.3 80.9,19.375 82.025,18.25 R16.1
NetC23_1: C23.1 R17.2 U9.10 | length 2.6
  Top Layer w0.15: C23.1 75.262,31.562 75.516,31.816 R17.2
NetC30_1: C30.1 G1.1 R21.2 U9.50 | length 18.2
  Top Layer w0.15: C30.1 33.738,51.687 34.05,51.375 35.55,51.375 35.85,51.075 35.85,48.234 ; U9.50 34.425,40.95 R21.2 35.85,48.234 ; G1.1 37.991,48.234 35.85,48.234
NetC31_1: C31.1 G1.2 R21.1 U9.51 | length 13.7
  Top Layer w0.15: U9.51 32.875,43.2 32.875,50 33.141,50.266 R21.1 ; C31.1 G1.2@38.741,56.916
NetC32_1: C32.1 G2.2 R23.2 U9.28 | length 9.8
  Top Layer w0.15: U9.28 37.525,29.6 37.909,29.216 R23.2 C32.1@37.909,25.325 ; G2.2@37.834,23.309 C32.1
NetC33_1: C33.1 G2.1 R23.1 U9.29 | length 16.2
  Top Layer w0.15: U9.29 39.425,30.1 39.941,29.584 R23.1 43.3,28.075 43.966,27.409 C33.1 G2.1@43.966,23.141
NetC34_1: C34.1 L2.2 U9.22
NetC35_2: C35.2 U9.26
NetC36_2: C36.2 L3.2 U9.23
NetC37_2: C37.2 D1.3 U9.30
NetL1_1: L1.1 U1.7
NetLED1_1: LED1.1 R15.2 | length 1.8
  Top Layer w0.15: R15.2 59.2,82.037 LED1.1
NetLED2_1: LED2.1 R24.2
NetLED3_1: LED3.1 R22.2
NetLED4_1: LED4.1 R25.2
NetLED5_1: LED5.1 R26.2
NetLED6_1: LED6.1 R27.2
NetLED7_1: LED7.1 R28.2
NetLED8_1: LED8.1 R29.2
NetR1_1: R1.1 U1.8
NetR2_1: R2.1 U3.2 U9.53 | length 4.3
  Top Layer w0.15: R2.1 45.691,51.391 45.95,51.65 47.25,51.65 47.7,51.2 U3.2
NetR3_1: R3.1 U3.3 U9.54 | length 4.6
  Top Layer w0.15: R3.1 45.666,48.034 48.032,50.4 U3.3
NetR4_1: R4.1 U4.2 U9.82 | length 7.7
  Bottom Layer w0.15: U4.2 54.326,50.325 57.726,53.725 R4.1
NetR5_1: R5.1 U4.3 U9.83 | length 6.9
  Bottom Layer w0.15: U4.3 54.1,49.675 55.55,51.125 R5.1
NetR15_1: R15.1 U7.13 | length 3.8
  Top Layer w0.15: R15.1 60.934,85.691 U7.13
NetR17_1: R17.1 U8.6 | length 4.5
  Top Layer w0.15: R17.1 77.05,27.4 77.475,26.975 U8.6
NetR18_2: R18.2 R19.1 U9.11 | length 2.9
  Top Layer w0.15: R18.2 81.466,31.716 82.025,32.275 R19.1
NetR20_2: R20.2 U9.37 X7.2 | length 14.4
  Top Layer w0.15: U9.37 34.1,34.075 45.9,34.075 46.315,33.66 X7.2
NetR22_1: R22.1 U9.96
NetR24_1: R24.1 U9.95
NetR25_1: R25.1 U9.94
NetR26_1: R26.1 U9.93
NetR27_1: R27.1 U9.81
NetR28_1: R28.1 U9.80
NetR29_1: R29.1 U9.69
NetU2_2: U2.2 U9.3 | length 28.9
  Top Layer w0.15: U9.3 21.175,28.625 22.2,29.65 32.35,29.65 32.7,29.3 32.7,25.654 32.175,25.129 32.175,16.95 32.47,16.655 U2.2
NetU2_3: U2.3 U9.4 | length 22.3
  Top Layer w0.15: U9.4 21.675,23.15 22.75,22.075 29.524,22.075 31.075,20.524 31.075,15.724 31.414,15.385 U2.3
NetU2_4: U2.4 U9.2 | length 23.6
  Top Layer w0.15: U9.2 20.675,23.45 22.35,21.775 29.4,21.775 30.775,20.4 30.775,15.6 32.26,14.115 U2.4
NetU2_5: U2.5 U9.64 | length 43.5
  Top Layer w0.15: U9.64 25.675,33.775 19.775,27.875 19.775,23.926 22.226,21.475 29.276,21.475 30.475,20.276 30.475,14.6 32.23,12.845 U2.5
NetU3_4: U3.4 U9.56 | length 55.9
  Top Layer w0.15: U9.56 29.675,59.95 31.55,61.825 41.25,61.825 42.175,60.9 42.175,45.975 42.625,45.525 46.275,45.525 46.8,46.05 46.8,48.726 47.674,49.6 U3.4
NetU3_5: U3.5 U9.55
NetU3_9: U3.9 U9.57
NetU4_6: U4.6 U9.85 | length 52.4
  Top Layer w0.15: U9.85 21.578,36.1 22.277,35.402 v1(22.126,35.402)
  Bottom Layer w0.15: v1(22.126,35.402) 22.375,35.153 22.375,31.841 23.321,30.895 48.219,30.895 49.975,32.651 49.975,45.75 50.325,46.1 U4.6
NetU4_7: U4.7 U9.84 | length 51.8
  Top Layer w0.15: U9.84 v1(21.825,36.6)
  Bottom Layer w0.15: v1(21.825,36.6) 22.675,35.75 22.675,31.965 23.445,31.195 48.095,31.195 49.675,32.775 U4.7
NetU5_2: U5.2 U9.71
NetU5_4: U5.4 U9.72
NetU5_6: U5.6 U9.76
NetU5_8: U5.8 U9.73
NetU6_1: U6.1 U9.97 | length 17.3
  Top Layer w0.15: U6.1 17.745,17.12 18.025,17.4 18.025,25.176 16.2,27.001 16.2,29.299 17.001,30.1 U9.97
NetU6_3: U6.3 U9.98 | length 19.6
  Top Layer w0.15: U6.3 18.155,14.58 18.325,14.75 18.325,25.301 16.5,27.126 16.5,29.175 16.925,29.6 U9.98
NetU6_5: U6.5 U9.99 | length 21.3
  Top Layer w0.15: U6.5 18.09,12.04 18.625,12.575 18.625,25.425 16.8,27.25 16.8,28.497 17.28,28.977 18.152,28.977 U9.99
NetU6_9: U6.9 U9.100 | length 26.6
  Top Layer w0.15: U9.100 17.327,28.6 17.1,28.373 17.1,27.374 18.95,25.524 18.95,11.25 21.97,8.23 U6.9
NetU7_2: U7.2 U9.45 | length 83.5
  Top Layer w0.15: U9.45 37.45,38.1 40.275,40.925 82.575,40.925 86.125,44.475 86.125,71.2 85.125,72.2 U7.2
NetU7_3: U7.3 U9.44 | length 86.3
  Top Layer w0.15: U9.44 37.374,37.6 40.399,40.625 82.699,40.625 86.425,44.351 86.425,73.025 85.25,74.2 U7.3
NetU7_5: U7.5 U9.43 | length 90.5
  Top Layer w0.15: U9.43 37.299,37.1 40.524,40.325 82.824,40.325 86.725,44.226 86.725,75.9 U7.5
NetU7_6: U7.6 U9.65 | length 105.8
  Top Layer w0.15: U9.65 25.175,60.5 27.325,62.65 54.85,62.65 57.45,65.25 57.45,87.3 59.375,89.225 63.7,89.225 72.725,80.2 U7.6
NetU7_9: U7.9 U9.42 | length 99.2
  Top Layer w0.15: U9.42 37.223,36.6 40.648,40.025 82.948,40.025 87.025,44.102 87.025,83.6 U7.9
NetU7_12: U7.12 U9.46 | length 80.3
  Top Layer w0.15: U9.46 37.526,38.6 40.151,41.225 65.325,41.225 67.5,43.4 67.5,81.125 U7.12
NetU7_16: U7.16 U9.47 | length 71.6
  Top Layer w0.15: U9.47 34.1,39.075 37.576,39.075 40.026,41.525 65.201,41.525 67.2,43.524 67.2,73.425 U7.16
NetU9_34: U9.34 X7.4 | length 14.1
  Top Layer w0.15: U9.34 39.25,32.6 39.895,31.955 39.895,30.967 40.767,30.095 44.92,30.095 45.045,30.22 X7.4
NetU9_35: U9.35 X7.8 | length 10.2
  Top Layer w0.15: U9.35 35.9,33.1 36.275,33.475 42.35,33.475 42.505,33.32 X7.8
NetU9_36: U9.36 X7.6 | length 11.7
  Top Layer w0.15: U9.36 35.976,33.6 36.151,33.775 43.5,33.775 43.775,33.5 X7.6
NetU9_38: U9.38 X7.9 | length 8.2
  Top Layer w0.15: U9.38 35.325,34.6 35.55,34.375 40,34.375 40.25,34.625 40.25,35.325 40.705,35.78 X7.9
NetU9_58: U9.58 X5.8
NetU9_59: U9.59 X6.3
NetU9_62: U9.62 X5.6
NetU9_63: U9.63 X5.7
NetU9_66: U9.66 U9.92 X6.4 X6.5
NetU9_67: U9.67 X5.3
NetU9_68: U9.68 X5.4
NetU9_69: X5.5
NetU9_77: U9.77 X6.6
NetU9_78: U9.78 X6.7
NetU9_79: U9.79 X6.8
NetU9_86: U9.86 X6.1
NetU9_87: U9.87 X6.2
NetU9_90: U9.90 X5.9
NetU9_91: U9.91 X5.10
RESET_B: R30.2 U9.52 X7.10 | length 19.4
  Top Layer w0.15: v1(31.675,40.925) U9.52 ; v1(40.42,31.72) X7.10
  Bottom Layer w0.15: v1(31.675,40.925) 31.675,33.4 33.355,31.72 v1(40.42,31.72)
VBAT: C2.1 J2.1 J2.3 J2.5 J2.7 R16.2 R18.1 U1.2 U1.3 U8.5 | length 17.2
  Top Layer w0.15: R16.2@73.35,18.25 R16.2 75.45,25.125 76.175,25.85 79.5,25.85 79.95,26.3 U8.5 ; U8.5@80.05,27.075 R18.1
pads on no net: G2.3 G2.4 U2.7 U2.8 U2.9 U2.10 U2.11 U2.12 U2.13 U2.14 U3.8 U5.10 U5.12 U7.4 U7.7 U7.8 U7.11 U7.15 U7.17 U7.18 U7.19 U7.20 U9.1 U9.5 U9.6 U9.7 U9.12 U9.13 U9.14 U9.15 U9.16 U9.17 U9.18 U9.19 U9.20 U9.21 U9.27 U9.31 U9.32 U9.33 U9.39 U9.70 X7.7

## Polygon pours and split planes (outlines as drawn)
NetC22_1 on Top Layer "Top Layer-No Net" (solid, pour order 8): 82.25,23.5 82.25,13 99,13 99,21 92.5,21 92.5,23.5 82.25,23.5
VBAT on Top Layer "Top Layer-No Net" (solid, pour order 9): 58.025,7.264 58.048,7.25 82.75,7.25 82.75,9.975 58.071,9.975
VBAT on Top Layer "Top Layer-No Net" (solid, pour order 10): 71.45,23.575 79.225,23.575 79.25,23.547 79.25,9.6 71.475,9.6
VBAT on Top Layer "Top Layer-No Net" (solid, pour order 14): 58.097,2.975 58.12,2.95 61.775,2.95 61.775,7.9 61.752,7.925 61.564,7.725 58.05,7.725
VBAT on Top Layer "Top Layer-No Net" (solid, pour order 13): 65.097,2.975 65.12,2.95 68.775,2.95 68.775,7.9 68.752,7.925 68.564,7.725 65.05,7.725
VBAT on Top Layer "Top Layer-No Net" (solid, pour order 12): 72.097,2.975 72.12,2.95 75.775,2.95 75.775,7.9 75.752,7.925 75.564,7.725 72.05,7.725
VBAT on Top Layer "Top Layer-No Net" (solid, pour order 11): 79.097,2.975 79.12,2.95 82.775,2.95 82.775,7.9 82.752,7.925 82.564,7.725 79.05,7.725
GND on Internal Plane 1 (split plane): 99.49,0.51 0.51,0.51 0.51,99.49 99.49,99.49
3.3V on Internal Plane 2 (split plane): 99.49,0.51 0.51,0.51 0.51,99.49 99.49,99.49

## Keep-outs
Keep-Out Layer:
  lines w0.2: 0.5,0.5 0.5,99.5 99.5,99.5 99.5,0.5 0.5,0.5

## Silkscreen, mask and mechanical layers (free items; w line width, h text height)
Mechanical 1:
  the board outline again, w0.2

## Text inside footprints (layer, text, board x,y; h text height)
X1: Top Overlay "S" at 6.675,81.45 h1.52 r270
X2: Top Overlay "S" at 6.675,71.45 h1.52 r270
X3: Top Overlay "S" at 6.675,14.45 h1.52 r270
X4: Top Overlay "S" at 93.325,85.55 h1.52 r90